# EAGLE board tick-ds3231-breakout-mk-1.0 (EAGLE 6.5.0)
VERSION: v1.0
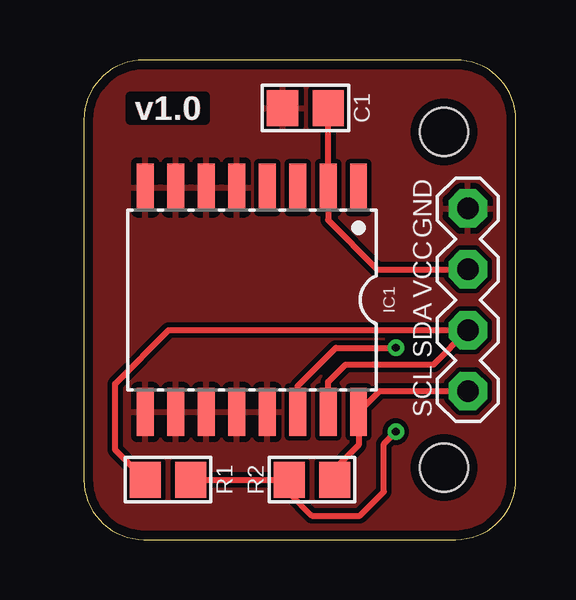
[diagram p0: board, top side]
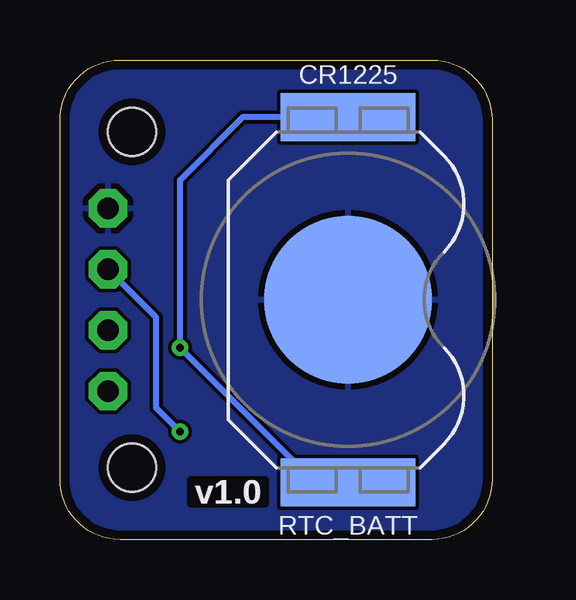
[diagram p1: board, bottom side, seen from below]

Size 18 x 20 mm. Coordinates in mm from the lower left corner, seen from the top.
Outline: 15.5,20 2.5,20 arc90 0,17.5 0,2.5 arc90 2.5,0 15.5,0 arc90 18,2.5 18,17.5 arc90 15.5,20
Copper layers (1*16): Top 0.0356mm / dielectric 1.5011mm / Bottom 0.0356mm
Design rules "LaenPCBOrder_2": minimum track width 6mil, minimum drill 13mil, track to track 6mil, track to pad 6mil, pad to pad 6mil, via to via 6mil, smd to smd 6mil, copper to edge 15mil, drill to drill 6mil, minimum pad ring 7mil, minimum via ring 7mil, stop-mask expansion 3mil, vias tented up to drill 20mil, thermal gap 10mil
Holes 2 mm at 15,3 15,17

## Footprints (pad centres in the part's own frame; a part is rotated, then mirrored left to right if it is on the bottom)
C0805 = smd 1.3 x 1.5: 1 -0.95,0; 2 0.95,0
1X04-PTH-VERT-I2C-CENTERED = drill 0.9 pad 1.6 octagon: GND -3.81,0; SCL 3.81,0; SDA 1.27,0; VCC -1.27,0
SO16W = smd 0.7 x 2: 1 -4.445,-4.685; 2 -3.175,-4.685; 3 -1.905,-4.685; 4 -0.635,-4.685; 5 0.635,-4.685; 6 1.905,-4.685; 7 3.175,-4.685; 8 4.445,-4.685; 9 4.445,4.685; 10 3.175,4.685; 11 1.905,4.685; 12 0.635,4.685; 13 -0.635,4.685; 14 -1.905,4.685; 15 -3.175,4.685; 16 -4.445,4.685
R0805 = smd 1.3 x 1.5: 1 -0.95,0; 2 0.95,0
BATTCON_12MM_SMD = smd 2 x 5.6: +@1 -7.62,0; +@2 7.62,0 | smd 7 x 7: - 0,0

## Placement (x,y rotation side)
C1  100n  [C0805]  9.22,18 180 top
FRAME1  FRAME-LETTERNO_PACKAGE  [DUMMY]  0,-0.5 0 top
I2C  M04-I2CPTH-0.1IN-CENTERED  [1X04-PTH-VERT-I2C-CENTERED]  16,10 270 top
IC1  DS3231  [SO16W]  7,10 180 top
R1  4.7k  [R0805]  3.5,2.5 180 top
R2  4.7k  [R0805]  9.5,2.5 0 top
RTC_BATT  CR1225  [BATTCON_12MM_SMD]  6,10 90 bottom

## Library data of the parts
C1 I2C IC1 R1 R2 RTC_BATT = A_butts
FRAME1 = A_butts; DESIGNER: sean@yak.net; VERSION: 1.0

## Nets
GND: C1.2 I2C.GND IC1.5 IC1.6 IC1.7 IC1.8 IC1.9 IC1.10 IC1.11 IC1.12 IC1.13 RTC_BATT.-
SCL: I2C.SCL IC1.16 R2.2
SDA: I2C.SDA IC1.15 R1.2
VBAT: IC1.14 RTC_BATT.+@1 RTC_BATT.+@2
VCC: C1.1 I2C.VCC IC1.2 R1.1 R2.1

## Tracks (layer width: path | path; a pad name or v marks a point on that pad's centre or on a via)
GND
  pour Top (isolate 0.2): 18,20 18,0 0,0 0,20
  pour Bottom: 0,0 0,20 18,20 18,0
SCL
  Top 0.25: I2C.SCL 12.32,6.19 IC1.16 11.45,3.94 10.45,2.95 R2.2
SDA
  Top 0.25: R1.2 1.3,3.75 1.3,6.5 3.53,8.73 I2C.SDA 14.57,7.3 10.9,7.3 10.18,6.58 IC1.15
VBAT  (via drill 0.33)
  Top 0.25: IC1.14 8.9,6.41 10.5,8 v13,8
  Bottom 0.25: RTC_BATT.+@2 10.38,17.62 13,15 v13,8 7.38,2.38 RTC_BATT.+@1
VCC  (via drill 0.33)
  Top 0.25: v13,4.5 12.5,4 12.5,2 11.5,1 9.5,1 8.55,1.95 R2.1 R1.1 | C1.1 IC1.2 10.18,13.32 12.23,11.27 I2C.VCC
  Bottom 0.25: v13,4.5 14,5.5 14,9.27 I2C.VCC